# Altium PCB IMU_Pcb.PcbDoc
Units mil, origin at the board's own origin, x right, y up, seen from the top; angles counter-clockwise.
Board outline 530 x 460 mil, 2 copper layers (Top Layer, Bottom Layer); 16 components, 9 nets, 51 pads, 0 vias.
Unrouted connection lines stored in the file: 29.
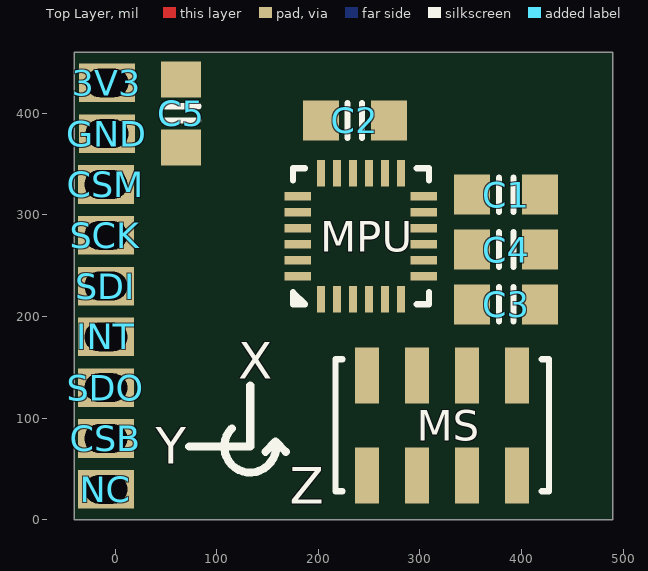
[diagram p0: Top Layer view]
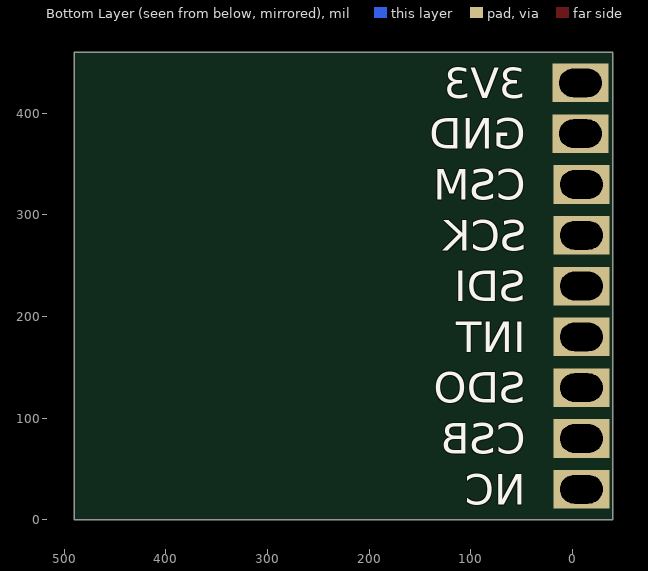
[diagram p1: Bottom Layer view, seen from below]

## Layer stack, top to bottom
Top Layer: signal copper 1.4
Dielectric: dielectric 12.6, FR-4, Dk 4.8
Bottom Layer: signal copper 1.4

## Board outline
-40,460 490,460 490,1 490,0 -40,0

## Design rules (kind name [scope] priority, off if disabled: settings)
Clearance ClearancePolygon [InPolygon] p1: gap=10
Clearance [All] p2: gap=6
ComponentClearance [All] p1: gap=0 collisioncheckmode=3 verticalgap=0 showdistances=FALSE
HoleToHoleClearance [All] p1: gap=6 allowstackedmicrovias=TRUE
MinimumSolderMaskSliver [All] p1: minsoldermaskwidth=5
PlaneConnect [All] p1: planeconnectstyle=Direct reliefexpansion=20 reliefentries=4 reliefconductorwidth=10 reliefairgap=10
PolygonConnect [All] p1: connectstyle=Direct reliefconductorwidth=10 reliefentries=4 polygonreliefangle="90 Angle" airgapwidth=10
RoutingVias [All] p1: holewidth=12 width=20 viastyle="Through Hole" minholewidth=12 minwidth=20 maxholewidth=28 maxwidth=50
SilkToSilkClearance [All] p1: silktosilkclearance=0
SilkToSolderMaskClearance [IsPad] p1: minsilkscreentomaskgap=2 clearancetoexposedcopper=TRUE
SolderMaskExpansion [All] p1: expansion=0
Width [All] p1: maxlimit=24 minlimit=6 preferedwidth=10
22 further rules are at their usual default settings.

## Components (designator, comment, footprint, x,y, rotation, side; value= is the part's Value field where it differs from the comment)
3V3 "Pad1X1_1.27" Pad1X1_1.27 -8,430 r0 top
C1 "Cap_0603" CAP_0603 385,320 r0 top
C2 "Cap_0603" CAP_0603 236,393 r180 top
C3 "Cap_0603" CAP_0603 385,212 r180 top
C4 "Cap_0603" CAP_0603 385,266 r0 top
C5 "Cap_0603" CAP_0603 65,400 r90 top
CSB "Pad1X1_1.27" Pad1X1_1.27 -9,80 r0 top
CSM "Pad1X1_1.27" Pad1X1_1.27 -9,330 r0 top
GND "Pad1X1_1.27" Pad1X1_1.27 -8,380 r0 top
INT "Pad1X1_1.27" Pad1X1_1.27 -9,180 r0 top
MPU "MPU9250" MPU9250 242,279 r90 top
MS "MS5611" MS5611 322,93 r270 top
NC "Pad1X1_1.27" Pad1X1_1.27 -9,30 r0 top
SCK "Pad1X1_1.27" Pad1X1_1.27 -9,280 r0 top
SDI "Pad1X1_1.27" Pad1X1_1.27 -9,230 r0 top
SDO "Pad1X1_1.27" Pad1X1_1.27 -9,130 r0 top

## Footprints (in the part's own frame and the unit in brackets; to place one, negate y for a bottom-side part, rotate by r counter-clockwise, add the part's x,y. Pads: shape width x height; smd on the part's side, far side on the other; paste and mask are expansions set on the pad)
CAP_0603 [mm] "Chip Capacitor, Body 1.6x0.8mm, 0603, IPC Medium Density"
  rect 0.9x1 smd: 1(-0.85,0) 2(0.85,0)
  Top Layer pour cut-out: -0.4,0.6 0.4,0.6 0.4,-0.6 -0.4,-0.6
  silkscreen extent -0.18,-0.43 0.18,0.43, body extent -0.85,-0.45 0.85,0.45, height 0.89
MPU9250 [mil] "QFN, 24-Leads, Body 3.00x3.00mm, Pitch 0.40mm, Thermal Pad 1.54x1.70mm, IPC Medium Density"
  rect 26x8 smd: 1(-62.01,39.37) 2(-62.01,23.62) 3(-62.01,7.87) 4(-62.01,-7.87) 5(-62.01,-23.62) 6(-62.01,-39.37) 13(62.01,-39.37) 14(62.01,-23.62) 15(62.01,-7.87) 16(62.01,7.87) 17(62.01,23.62) 18(62.01,39.37)
  rect 8x26 smd: 7(-39.37,-62.01) 8(-23.62,-62.01) 9(-7.87,-62.01) 10(7.87,-62.01) 11(23.62,-62.01) 12(39.37,-62.01) 19(39.37,62.01) 20(23.62,62.01) 21(7.87,62.01) 22(-7.87,62.01) 23(-23.62,62.01) 24(-39.37,62.01)
  silkscreen extent -67,-67 67,67, body extent -81,-81 81,81, height 31
MS5611 [mm] "QFN, 8-Leads, Body 5.00x3.00mm, Pitch 1.25mm/0.00mm, Thermal Pad 4.35x0.00mm, IPC Medium Density"
  rect 1.4x0.6 smd: 1(-1.25,1.875) 2(-1.25,0.625) 3(-1.25,-0.625) 4(-1.25,-1.875) 5(1.25,-1.875) 6(1.25,-0.625) 7(1.25,0.625) 8(1.25,1.875)
  silkscreen extent -1.65,-2.67 1.65,2.67, body extent -1.6,-2.5 1.6,2.5, height 1
Pad1X1_1.27 [mil] "Connector; Header; 2 Position"
  rect 55x38 hole 28 slot 42 at 0 deg: 1(0,0)

## Part data
3V3 CSB CSM GND INT NC SCK SDI SDO: "Header"
C1 C2 C3 C4 C5: "Capacitor"
MPU MS: "Sensor"

## Nets (pads, with @x,y where several pads share a name; then routed paths per layer and width w, separated by ;. In a path a pad name is that pad's centre, name@x,y a point inside that pad or via, vN(x,y) a via of type N, cw(c..) or ccw(c..) an arc to the next point about the centre after c; other vN are vias at no path point)
3V3: 3V3.1 C2.1 C3.2 C4.1 C5.2 MPU.1 MPU.8 MPU.13 MS.1
CSB: CSB.1 MS.4 MS.5
CSM: CSM.1 MPU.22
GND: C1.2 C2.2 C3.1 C4.2 C5.1 GND.1 MPU.11 MPU.18 MPU.20 MS.2 MS.3
INT: INT.1 MPU.12
NetC1_1: C1.1 MPU.10
SCK: MPU.23 MS.8 SCK.1
SDI: MPU.24 MS.7 SDI.1
SDO: MPU.9 MS.6 SDO.1
pads on no net: MPU.2 MPU.3 MPU.4 MPU.5 MPU.6 MPU.7 MPU.14 MPU.15 MPU.16 MPU.17 MPU.19 MPU.21 NC.1

## Silkscreen, mask and mechanical layers (free items; w line width, h text height)
Top Overlay:
  lines w8: 73.03,71.97 133.03,71.97 133.03,131.97 ; 115,90 ccw(c133.03,71.97) 158.03,76.97 ; 148.03,66.97 158.03,76.97 ; 168.03,66.97 158.03,76.97
  text "X" at 121.03,138.97 h36
  text "Y" at 40.03,54.97 h36
  text "Z" at 172.03,15.97 h36
Mechanical 1:
  lines w0: -40,0 -40,460 490,460 490,0 -40,0